# Allegro board DAVID_LUCA_2023_PACT_N8_rev4.brd
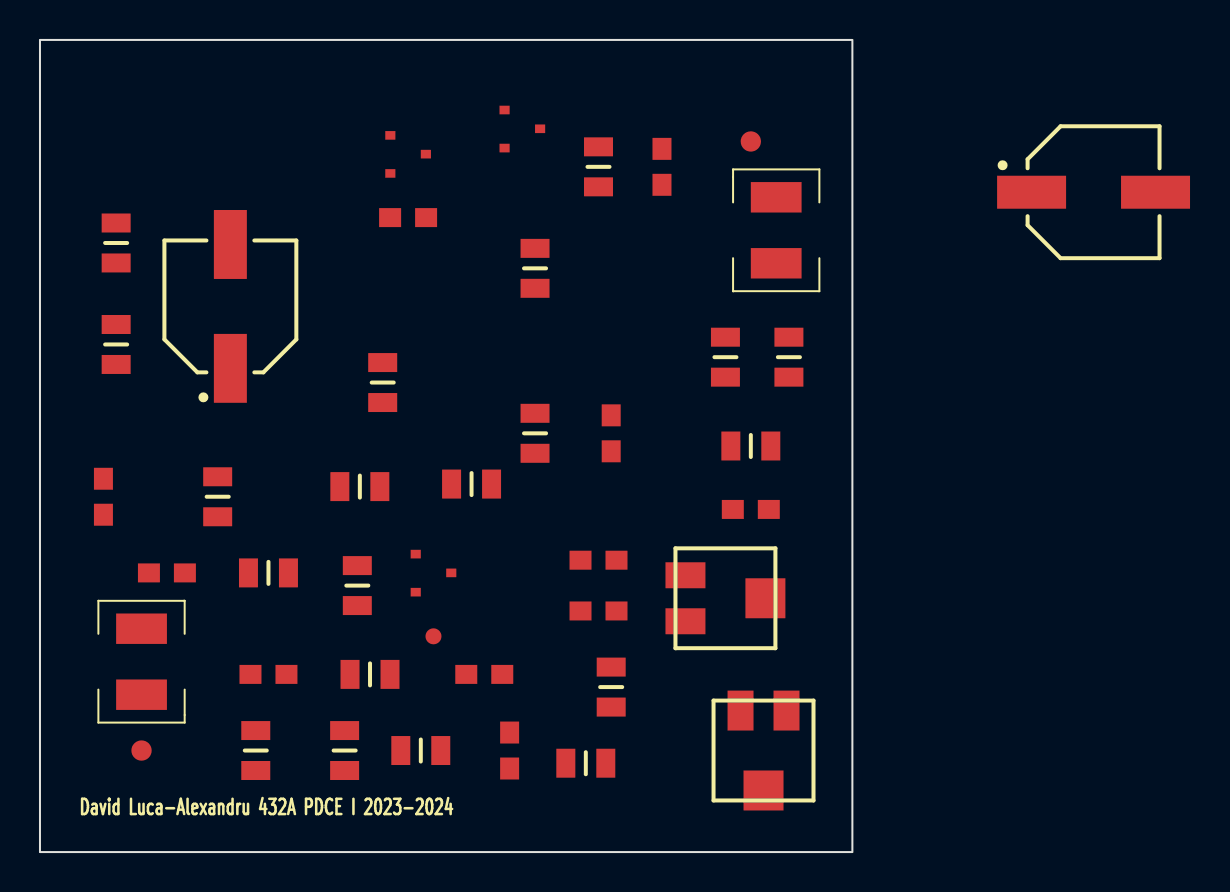
[diagram p0: board, top side]
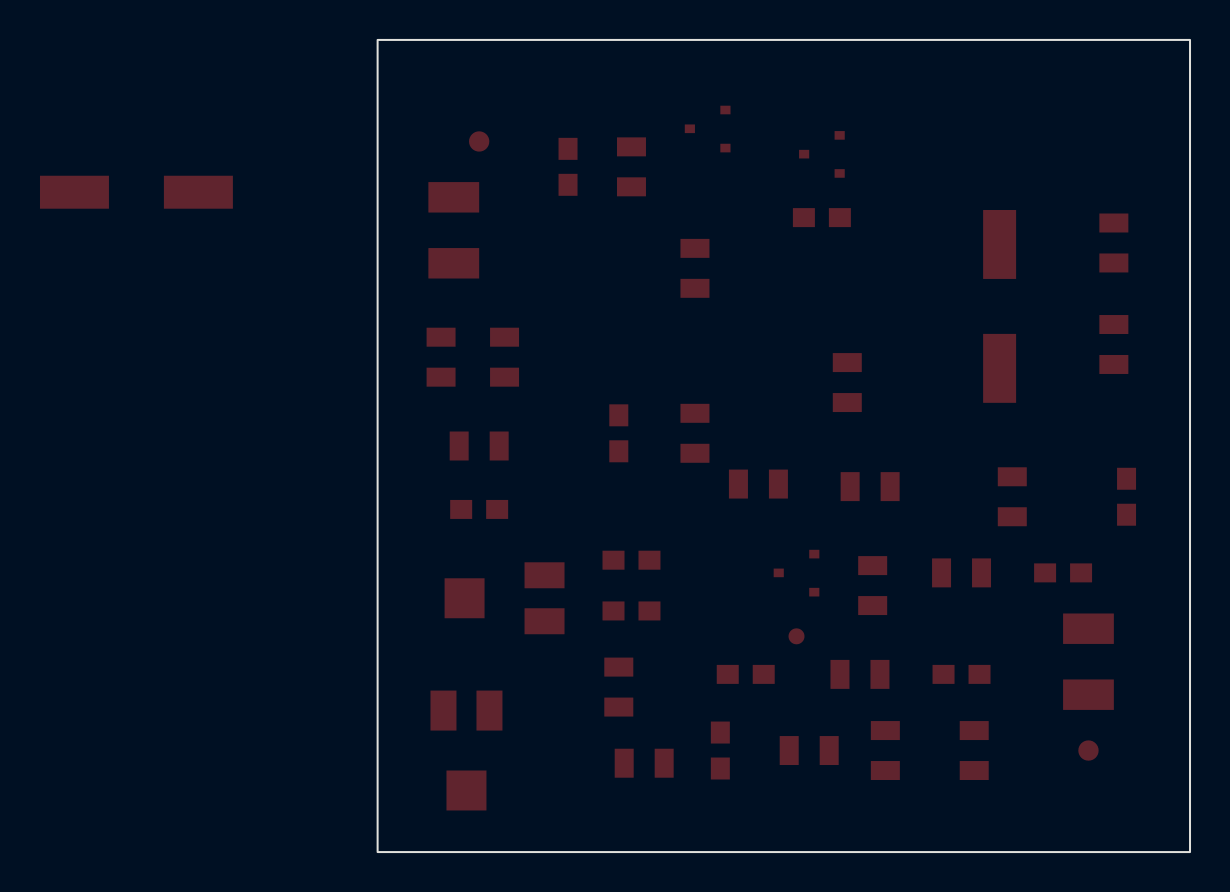
[diagram p1: board, bottom side, seen from below]

Outline 40.64 x 40.64 mm; copper layers: TOP, BOTTOM. Coordinates in mm from the lower left corner of the outline.
Outline path: rectangle 0,0 40.64,40.64

## Design rules (mm)
nets with their own width: min track width 0.406; nets 0 N56928 N56942 N57058 N57064 N57080 N57092 N57114 N57224 N57230 N57234 N57380 N57386 N57392 N57408 N57452 N57458 N57528 N57592 N57832 N57998 N58004 N576520 N576740 N578981

## Placement (name value [footprint] x y rotation side)
C1  100n  [CAPC2008X126N_0805]  6.35 13.97 0 top
C2  4.7u  [CAPC2008X126N_0805]  11.43 8.89 0 top
C3  4.7u  [CAPC2008X126N_0805]  22.23 8.89 0 top
C4  1u  [CAPC2008X126N_0805]  35.56 17.14 180 top
C5  10u  [CAPAE660X770N]  9.53 27.3 90 top
C6  10u  [CAPAE660X770N]  52.7 33.02 0 top
C7  4.7u  [CAPC2008X126N_0805]  3.17 17.78 270 top
C8  100n  [CAPC2008X126N_0805]  27.94 12.06 180 top
C9  100n  [CAPC2008X126N_0805]  27.94 14.61 0 top
C10  2.2n  [CAPC2008X126N_0805]  23.5 5.08 270 top
C11  2.2n  [CAPC2008X126N_0805]  28.57 20.95 90 top
C12  4.7u  [CAPC2008X126N_0805]  31.11 34.29 270 top
C13  4.7u  [CAPC2008X126N_0805]  18.41 31.75 180 top
J1  CON2  [1210RF_WV_12D]  5.08 9.53 270 top
J2  CON2  [1210RF_WV_12D]  36.83 31.11 90 top
J3  CON1  [TP80]  19.68 10.79 0 top
P1  50K  [TRIM_BI_23AN]  34.29 12.7 180 top
P2  100k  [TRIM_BI_23AN]  36.2 5.08 90 top
Q1  BC846B  [SOT23]  19.68 13.97 0 top
Q2  BC846B  [SOT23]  18.41 34.92 0 top
Q3  BC846B  [SOT23]  24.13 36.2 0 top
R1  1k  [RES2012X50N_0805]  11.43 13.97 0 top
R2  68k  [RES2012X50N_0805]  8.89 17.78 90 top
R3  100k  [RES2012X50N_0805]  10.79 5.08 90 top
R4  22k  [RES2012X50N_0805]  16 18.29 180 top
R5  100k  [RES2012X50N_0805]  15.88 13.34 270 top
R6  5.6K  [RES2012X50N_0805]  15.24 5.08 270 top
R7  330  [RES2012X50N_0805]  16.51 8.89 0 top
R8  1000k  [RES2012X50N_0805]  21.59 18.41 180 top
R9  100k  [RES2012X50N_0805]  3.81 25.4 270 top
R10  100k  [RES2012X50N_0805]  24.77 29.21 270 top
R11  22k  [RES2012X50N_0805]  27.94 34.29 270 top
R12  6.8k  [RES2012X50N_0805]  34.29 24.77 90 top
R13  2.7k  [RES2012X50N_0805]  37.47 24.77 270 top
R14  8.2k  [RES2012X50N_0805]  28.57 8.26 270 top
R15  8.2k  [RES2012X50N_0805]  24.77 20.95 270 top
R16  2.2k  [RES2012X50N_0805]  27.3 4.45 180 top
R17  15k  [RES2012X50N_0805]  35.56 20.32 180 top
R18  100k  [RES2012X50N_0805]  3.81 30.48 270 top
R19  33  [RES2012X50N_0805]  19.05 5.08 0 top
R20  2.5k  [RES2012X50N_0805]  17.14 23.5 270 top
REF  Value  [unnamed]  5.08 5.08 0 top
REF#2  Value  [unnamed]  35.56 35.56 0 top

## Library data of the parts
C1-C4 C7-C13 = C
C5 C6 = CAP POL
J1 J2 = CON2
J3 = CON1
P1 P2 = POT
Q1-Q3 = BC846B
R1-R20 = R

## Footprints (pads in the part's own frame, mm; a bottom-side part is the same pattern mirrored in y, then rotated)
1210RF_WV_12D
  rect 1.524x2.54 smd: 1(-1.651,0) 2(1.651,0)
CAPAE660X770N
  rect 3.45x1.65 smd: 1(-3.1,0) 2(3.1,0)
CAPC2008X126N_0805
  rect 1.1x0.95 smd: 1(-0.9,0) 2(0.9,0)
RES2012X50N_0805
  rect 0.95x1.45 smd: 1(-1,0) 2(1,0)
SOT23
  rect 0.508x0.432 smd: 1(-0.889,0.94) 2(-0.889,-0.965) 3(0.889,0)
TP80
  round 0.8 smd: 1(0,0)
TRIM_BI_23AN
  rect 2x1.3 smd: 1(2,1.15) 2(2,-1.15)
  rect 2x2 smd: 3(-2,0)
unnamed
  round 1.016 smd: 1(0,0)

## Nets
0: C5.2 C7.1 C12.1 J1.2 J2.1 R3.1 R6.2 R11.1 R13.1 R18.1 R20.1
N56928: C7.2 R2.2 R4.2
N56942: J2.2 Q1.3 Q3.3 R4.1 R8.2 R10.2
N57058: C3.2 C10.1 R14.2
N57064: C8.1 P1.1 R14.1
N57080: C9.2 P1.3 R15.2
N57092: C11.2 R12.1 R13.2 R15.1
N57114: C8.2 C9.1 P1.2(T) R17.2
N57224: C4.2 Q2.1 R8.1 R9.2
N57230: Q2.3 Q3.1 R10.1
N57234: C2.1 R2.1 R3.2 R5.2
N57380: C1.1 J1.1
N57386: C1.2 R1.1
N57392: Q1.1 R1.2 R5.1
N57408: C6.1 C13.1 Q3.2(E) R12.2
N57452: C2.2 J3.1 Q1.2(E) R6.1 R7.1
N57458: C4.1 P2.2(T) R17.1
N57528: C6.2 C13.2 R20.2
N57592: C5.1 C12.2 Q2.2(E) R11.2
N57832: R9.1 R18.2
N57998: P2.3 R16.1
N58004: C11.1 P2.1
N576520: R7.2 R19.1
N576740: C3.1 R19.2
N578981: C10.2 R16.2

Pads without a net: REF 1; REF#2 1

## Text on the board
Ref Des/Silkscreen Top: David Luca-Alexandru 432A PDCE I 2023-2024
